# Altium PCB Board_nonBGA.PcbDoc (part 1 of 2)
Units mil, origin at the board's own origin, x right, y up, seen from the top; angles counter-clockwise.
Board outline 6000 x 4000 mil, 2 copper layers (Top Layer, Bottom Layer); 87 components, 98 nets, 630 pads, 48 vias.
Unrouted connection lines stored in the file: 240.
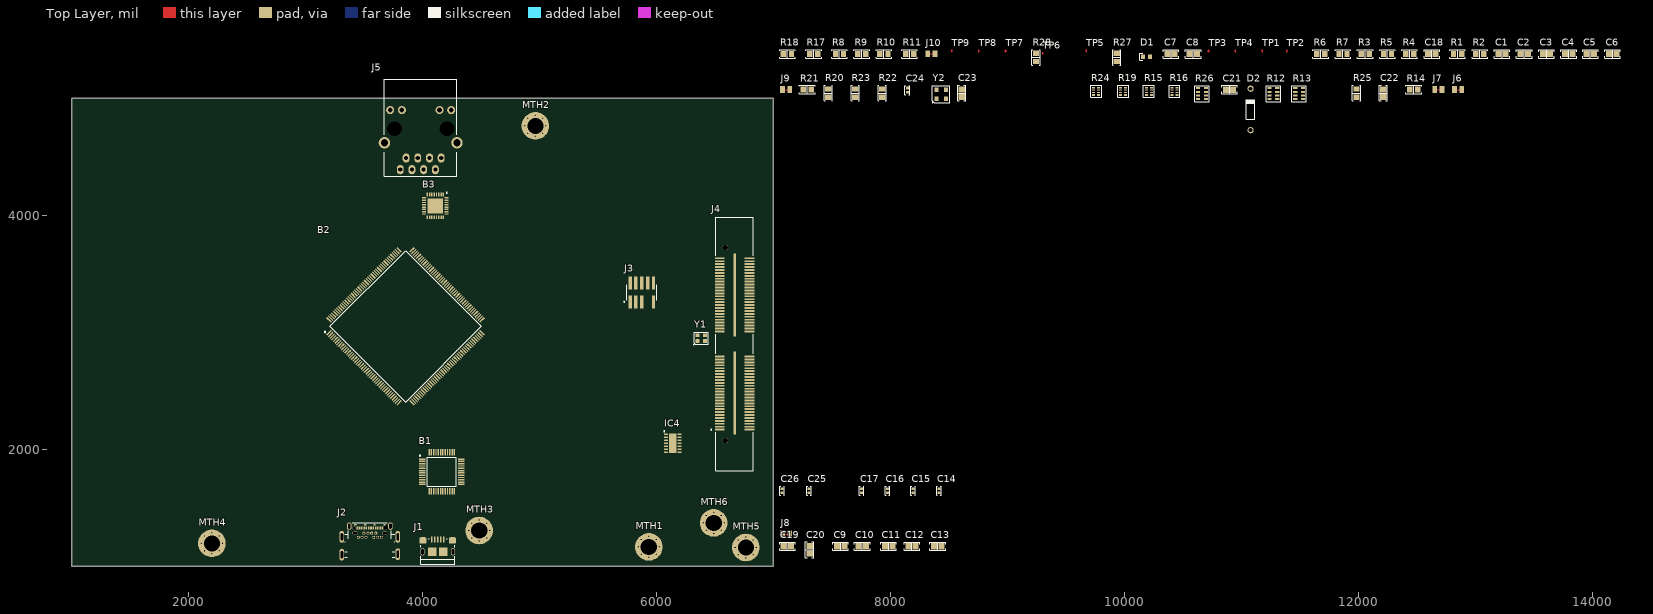
[diagram p0: Top Layer view]
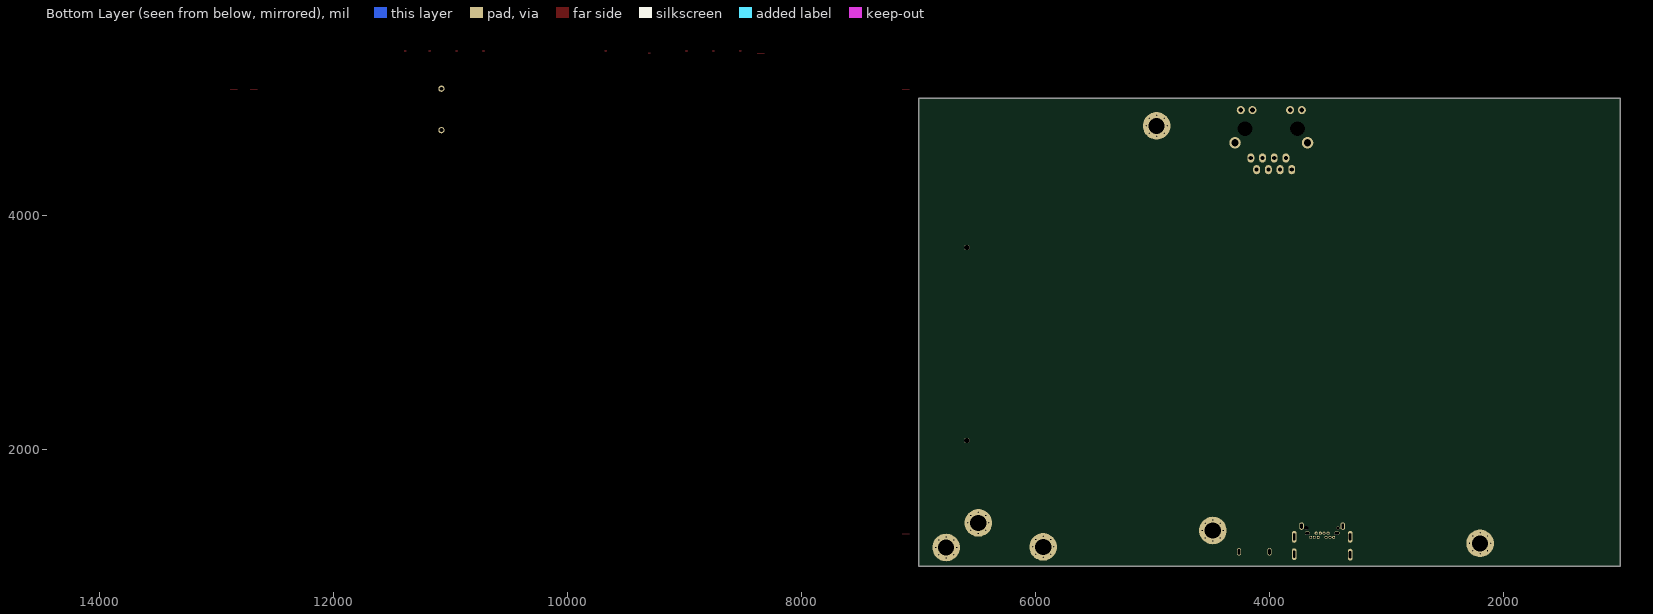
[diagram p1: Bottom Layer view, seen from below]

## Layer stack, top to bottom
Top Solder: solder mask 0.4, Solder Resist, Dk 3.5
Top Layer: signal copper 1.4
Dielectric 1: dielectric 12.6, FR-4, Dk 4.8
Bottom Layer: signal copper 1.4
Bottom Solder: solder mask 0.4, Solder Resist, Dk 3.5

## Board outline
1000,1000 7000,1000 7000,5000 1000,5000

## Design rules (kind name [scope] priority, off if disabled: settings)
Clearance [All] p1: gap=10 ignorepadtopadclearanceinfootprint=FALSE except(0: Arc-Hole Track-Hole SMDPad-Hole THPad-Hole Via-Hole Fill-Hole Poly-Hole Region-Hole Text-Hole)
DiffPairsRouting [All] p1: maxlimit=10 minlimit=10 mostfreqgap=10 toplayer_minwidth=15 toplayer_maxwidth=15 toplayer_prefwidth=15 bottomlayer_minwidth=15 bottomlayer_maxwidth=15 bottomlayer_prefwidth=15 maxuncoupledlength=500
PolygonConnect [All] p1: connectstyle=Relief reliefconductorwidth=10 reliefentries=4 polygonreliefangle="90 Angle" airgapwidth=10
RoutingVias [All] p1: holewidth=28 width=50 viastyle="Through Hole" minholewidth=28 minwidth=50 maxholewidth=28 maxwidth=50
SolderMaskExpansion [All] p1: expansion=4 istentingtop=FALSE
Width [All] p1: maxlimit=10 minlimit=10 preferedwidth=10
29 further rules are at their usual default settings.

## Classes and differential pairs
component class U_HighSpeedInterfaces: B3 C21 C22 C23 C24 D2 J5 J6 J7 J9 R12 R13 R14 R15 R16 R19 R20 R21 R22 R23 R24 R25 R26 Y2
component class U_CanFD: C14 C15 C16 C17 C25 C26 IC1 IC2 IC4
component class U_Board: B2 C9 C10 C11 C12 C13 C19 C20 J8 MTH1 MTH2 MTH3 MTH4 MTH5 MTH6
component class U_JTAG: B1 C1 C2 C3 C4 C5 C6 C7 C8 C18 D1 J1 J2 J3 J10 R1 R2 R3 R4 R5 R6 R7 R8 R9 R10 R11 R17 R18 R27 R28 TP1 TP2 TP3 TP4 TP5 TP6 TP7 TP8 TP9 Y1
component class U_Connectors: J4
differential pair TP_B: +TP_B_P -TP_B_N
differential pair TP_A: +TP_A_P -TP_A_N

## Components (designator, comment, footprint, x,y, rotation, side; value= is the part's Value field where it differs from the comment)
B1 "R7FA4M2AD3CFL#BA0" QFP50P900X900X170-48N 4165,1807.73 r0 top
B2 "R7FA8M1AFECFC#BA0" QFP50P2600X2600X160-176N 3855,3050 r45 top
B3 "1894K-32LF" 1894K-32LF 4110,4080 r270 top
C1 "0.1 µF" "CAP 0805_2012" 13230,5380 r0 top
C2 "0.1 µF" "CAP 0805_2012" 13420,5380 r0 top
C3 "0.1 µF" "CAP 0805_2012" 13610,5380 r0 top
C4 "0.1 µF" "CAP 0805_2012" 13800,5380 r0 top
C5 "0.1 µF" "CAP 0805_2012" 13985,5380 r0 top
C6 "0.1 µF" "CAP 0805_2012" 14175,5380 r0 top
C7 "10 pF" "CAP 0805_2012" 10400,5380 r0 top
C8 "10 pF" "CAP 0805_2012" 10590,5380 r0 top
C9 "10 µF" "CAP 0805_2012" 7575,1170 r0 top
C10 "100nF" "CAP 0805_2012" 7760,1170 r0 top
C11 "100nF" "CAP 0805_2012" 7985,1170 r0 top
C12 "10 µF" "CAP 0805_2012" 8185,1170 r0 top
C13 "100nF" "CAP 0805_2012" 8405,1170 r0 top
C14 "0.1 µF" "CAP 0402_1005" 8415,1645 r90 top
C15 "0.1 µF" "CAP 0402_1005" 8195,1645 r90 top
C16 "0.1 µF" "CAP 0402_1005" 7975,1645 r90 top
C17 "0.1 µF" "CAP 0402_1005" 7755,1645 r90 top
C18 "0.22 µF" "CAP 0805_2012" 12630,5380 r0 top
C19 "22µF" "CAP 0805_2012" 7120,1170 r0 top
C20 "100nF" "CAP 0805_2012" 7310,1140 r90 top
C21 "10 pF" "CAP 0805_2012" 10900,5075 r0 top
C22 "10 µF" "CAP 0805_2012" 12215,5045 r90 top
C23 "10 µF" "CAP 0805_2012" 8610,5045 r90 top
C24 "0.1 µF" "CAP 0402_1005" 8145,5070 r90 top
C25 "0.1 µF" "CAP 0402_1005" 7305,1645 r90 top
C26 "0.1 µF" "CAP 0402_1005" 7075,1645 r90 top
D1 "RED" LED_0603_RED 10190,5355 r0 top
D2 "1N4148" NXP-SOD27-2_V 11080,4905 r90 top
IC4 "MCP2518FDT-H_QBB" SON65P300X450X90-15N-D 6140,2050 r0 top
J1 "10118193-0001LF" "FCI USB 10118193-0001LF" 4130.48,1125.51 r180 top
J2 "2129691-1" "TE USB-C 2129691-1" 3550,1150 r180 top
J3 "FTSH-105-01-L-DV-007" SAMTEC_FTSH-105-01-L-DV-007 5875,3340 r0 top
J4 "QFS-052-04.25-XX-D-A-GP" SAMTEC_QFS-052-04.25-XX-D-A-GP 6669.1,2900 r90 top
J5 "ARJC02-111008B" "ABRACON ARJC02-111008B" 3985,4750 r180 top
J6 "A solder Bridge" "Solder Bridge 805" 12855,5075 r0 top
J7 "A solder Bridge" "Solder Bridge 805" 12685,5075 r0 top
J8 "A solder Bridge" "Solder Bridge 805" 7110,1275 r0 top
J9 "A solder Bridge" "Solder Bridge 805" 7110,5075 r0 top
J10 "A solder Bridge" "Solder Bridge 805" 8350,5380 r0 top
MTH1 "Mounting_Hole_3.5mm" Mounting_Hole_3.5mm 5935,1165 r0 top
MTH2 "Mounting_Hole_3.5mm" Mounting_Hole_3.5mm 4965,4765 r0 top
MTH3 "Mounting_Hole_3.5mm" Mounting_Hole_3.5mm 4485,1305 r0 top
MTH4 "Mounting_Hole_3.5mm" Mounting_Hole_3.5mm 2200,1195 r0 top
MTH5 "Mounting_Hole_3.5mm" Mounting_Hole_3.5mm 6765,1160 r0 top
MTH6 "Mounting_Hole_3.5mm" Mounting_Hole_3.5mm 6490,1370 r0 top
R1 "150 Ohms" "RES 0805_2012" 12850,5380 r0 top
R2 "30 kOhms" "RES 0805_2012" 13040,5380 r0 top
R3 "10k" "RES 0805_2012" 12060,5380 r0 top
R4 "150 Ohms" "RES 0805_2012" 12440,5380 r0 top
R5 "150 Ohms" "RES 0805_2012" 12250,5380 r0 top
R6 "4.7 kOhms" "RES 0805_2012" 11680,5380 r0 top
R7 "150 Ohms" "RES 0805_2012" 11870,5380 r0 top
R8 "10k" "RES 0805_2012" 7565,5380 r0 top
R9 "10k" "RES 0805_2012" 7755,5380 r0 top
R10 "10k" "RES 0805_2012" 7945,5380 r0 top
R11 "150 Ohms" "RES 0805_2012" 8165,5380 r0 top
R12 "10k" "RESNET 1206-8 CONVEX" 11275,5040 r0 top
R13 "10k" "RESNET 1206-8 CONVEX" 11495,5040 r0 top
R14 "1 kOhms" "RES 0805_2012" 12475,5075 r0 top
R15 "33R" "RESNET 0804-8 CONVEX" 10210,5060 r0 top
R16 "33R" "RESNET 0804-8 CONVEX" 10430,5060 r0 top
R17 "5.1 kOhms" "RES 0805_2012" 7345,5380 r0 top
R18 "5.1 kOhms" "RES 0805_2012" 7120,5380 r0 top
R19 "33R" "RESNET 0804-8 CONVEX" 9990,5060 r0 top
R20 "1 kOhms" "RES 0805_2012" 7470,5045 r90 top
R21 "10 kOhms" "RES 0805_2012" 7290,5075 r0 top
R22 "1 kOhms" "RES 0805_2012" 7930,5045 r90 top
R23 "10 kOhms" "RES 0805_2012" 7700,5045 r90 top
R24 "33R" "RESNET 0804-8 CONVEX" 9760,5060 r0 top
R25 "1 kOhms" "RES 0805_2012" 11985,5045 r90 top
R26 "10k" "RESNET 1206-8 CONVEX" 10665,5040 r0 top
R27 "15 kOhms" "RES 0805_2012" 9935,5350 r90 top
R28 "30 kOhms" "RES 0805_2012" 9245,5350 r90 top
TP1 "TestPad" "Test Pad Small" 11180,5405 r90 top
TP2 "TestPad" "Test Pad Small" 11390,5405 r90 top
TP3 "TestPad" "Test Pad Small" 10720,5405 r90 top
TP4 "TestPad" "Test Pad Small" 10950,5405 r90 top
TP5 "TestPad" "Test Pad Small" 9675,5405 r90 top
TP6 "TestPad" "Test Pad Small" 9303.4,5385 r90 top
TP7 "TestPad" "Test Pad Small" 8985,5405 r90 top
TP8 "TestPad" "Test Pad Small" 8755,5405 r90 top
TP9 "TestPad" "Test Pad Small" 8525,5405 r90 top
Y1 "12MHz" "ABRACON ABM10" 6382.52,2949.61 r0 top
Y2 "50MHz" "ABRACON ASEMB" 8435,5035 r0 top

## Footprints (in the part's own frame and the unit in brackets; to place one, negate y for a bottom-side part, rotate by r counter-clockwise, add the part's x,y. Pads: shape width x height; smd on the part's side, far side on the other; paste and mask are expansions set on the pad)
1894K-32LF [mm]
  rect 0.85x0.3 smd: 1(-2.45,1.75) 2(-2.45,1.25) 3(-2.45,0.75) 4(-2.45,0.25) 5(-2.45,-0.25) 6(-2.45,-0.75) 7(-2.45,-1.25) 8(-2.45,-1.75) 17(2.45,-1.75) 18(2.45,-1.25) 19(2.45,-0.75) 20(2.45,-0.25) 21(2.45,0.25) 22(2.45,0.75) 23(2.45,1.25) 24(2.45,1.75)
  rect 0.3x0.85 smd: 9(-1.75,-2.45) 10(-1.25,-2.45) 11(-0.75,-2.45) 12(-0.25,-2.45) 13(0.25,-2.45) 14(0.75,-2.45) 15(1.25,-2.45) 16(1.75,-2.45) 25(1.75,2.45) 26(1.25,2.45) 27(0.75,2.45) 28(0.25,2.45) 29(-0.25,2.45) 30(-0.75,2.45) 31(-1.25,2.45) 32(-1.75,2.45)
  rect 3.3x3.3 smd: 33(0,0)
  silkscreen extent -3,2.38 -2.75,2.63, body extent -2.55,-2.55 2.55,2.55, height 1
"ABRACON ABM10" [mm] "Crystal, 4-Leads, Body 2.00x2.45mm, Pitch 1.65mm, IPC Medium Density"
  rect 0.9x0.8 smd: 1(-0.825,-0.625) 2(0.825,-0.625) 3(0.825,0.625) 4(-0.825,0.625)
  silkscreen extent -1.65,-1.45 1.5,1.3, body extent -1.27,-1.02 1.28,1.03, height 0.5
"ABRACON ARJC02-111008B" [mm]
  oval 1.5x2 hole 0.9: 1(-4.445,6.6) 2(-3.175,9.14) 3(-1.905,6.6) 4(-0.635,9.14) 5(0.635,6.6) 6(1.905,9.14) 7(3.175,6.6) 8(4.445,9.14)
  round 1.75 hole 1.02: 9(-6.63,-3.81) 10(-4.09,-3.81) 11(4.09,-3.81) 12(6.63,-3.81)
  round 0 hole 3.2 unplated: M(-5.715,0.25) M(5.715,0.25)
  round 2.5 hole 1.6: S(-7.875,3.3) S(7.875,3.3)
  silkscreen extent -7.87,-10.54 7.87,10.54, body extent -10.34,-10.55 10.34,10.55, height 16.07
"ABRACON ASEMB" [mm] "MEMS Clock, 4-Leads, Body 2.50x3.20mm, Pitch 2.10mm, IPC Medium Density"
  rect 0.9x1 smd: 1(-1.05,-0.95) 2(1.05,-0.95) 3(1.05,0.95) 4(-1.05,0.95)
  silkscreen extent -1.95,-1.85 1.9,1.8, body extent -1.63,-1.28 1.63,1.27, height 0.85
"CAP 0402_1005" [mm] "Chip Capacitor, 2-Leads, Body 1.02x0.51mm, IPC Medium Density"
  rect 0.6x0.64 smd: 1(-0.44,0) 2(0.44,0)
  silkscreen extent -1,-0.5 1,0.5, body extent -0.5,-0.26 0.5,0.26, height 0.52
"CAP 0805_2012" [mm] "Chip Capacitor, 2-Leads, Body 2.00x1.20mm, IPC Medium Density"
  rect 1.3x1.4 smd: 1(-0.8,0) 2(0.8,0)
  silkscreen extent -1.7,-0.9 1.7,0.9, body extent -1,-0.64 1,0.64, height 1.26
"FCI USB 10118193-0001LF" [mm] "USB 2.0 Type B Micro"
  oval 0.4x1.35 smd: 1(1.3,-2.625) 2(0.65,-2.625) 3(0,-2.625) 4(-0.65,-2.625) 5(-1.3,-2.625)
  oval 0.9x1.6 hole 0.5 slot 1.2 at 90 deg: S(-3.3,0.05) S(3.3,0.05)
  rrect50% 1.6x1.4 smd: S(-3.2,-2.4) S(3.2,-2.4)
  rect 1.9x1.8 smd: S(-1.2,0.05) S(1.2,0.05)
  silkscreen extent -3.7,-2.8 3.7,2.8, body extent -3.93,-2.9 3.93,2.76, height 2.78
LED_0603_RED [mm]
  rect 0.8x1 smd: A(0.75,0) K(-0.75,0)
  silkscreen extent -1.5,-0.8 -0.8,0.8, body extent -0.8,-0.4 0.8,0.4, height 0.6
Mounting_Hole_3.5mm [mm]
  round 6 hole 3.5: 1(0,0)
NXP-SOD27-2_V [mm] "SOD27, 2-Leads, Dia 1.85mm, Body Length 4.25mm, Pin Spacing 9mm"
  round 1.35 hole 0.85: 1(-4.5,0) 2(4.5,0)
  silkscreen extent -2.12,-0.93 2.13,0.92, body extent -4.78,-0.93 4.78,0.92, height 1.85
QFP50P900X900X170-48N [mm]
  rect 1.475x0.3 smd: 1(-4.238,2.75) 2(-4.238,2.25) 3(-4.238,1.75) 4(-4.238,1.25) 5(-4.238,0.75) 6(-4.238,0.25) 7(-4.238,-0.25) 8(-4.238,-0.75) 9(-4.238,-1.25) 10(-4.238,-1.75) 11(-4.238,-2.25) 12(-4.238,-2.75) 25(4.238,-2.75) 26(4.238,-2.25) 27(4.238,-1.75) 28(4.238,-1.25) 29(4.238,-0.75) 30(4.238,-0.25) 31(4.238,0.25) 32(4.238,0.75) 33(4.238,1.25) 34(4.238,1.75) 35(4.238,2.25) 36(4.238,2.75)
  rect 0.3x1.475 smd: 13(-2.75,-4.238) 14(-2.25,-4.238) 15(-1.75,-4.238) 16(-1.25,-4.238) 17(-0.75,-4.238) 18(-0.25,-4.238) 19(0.25,-4.238) 20(0.75,-4.238) 21(1.25,-4.238) 22(1.75,-4.238) 23(2.25,-4.238) 24(2.75,-4.238) 37(2.75,4.238) 38(2.25,4.238) 39(1.75,4.238) 40(1.25,4.238) 41(0.75,4.238) 42(0.25,4.238) 43(-0.25,4.238) 44(-0.75,4.238) 45(-1.25,4.238) 46(-1.75,4.238) 47(-2.25,4.238) 48(-2.75,4.238)
  silkscreen extent -4.85,-3.15 3.15,3.62
QFP50P2600X2600X160-176N [mm]
  rect 1.475x0.3 smd: 1(-12.738,10.75) 2(-12.738,10.25) 3(-12.738,9.75) 4(-12.738,9.25) 5(-12.738,8.75) 6(-12.738,8.25) 7(-12.738,7.75) 8(-12.738,7.25) 9(-12.738,6.75) 10(-12.738,6.25) 11(-12.738,5.75) 12(-12.738,5.25) 13(-12.738,4.75) 14(-12.738,4.25) 15(-12.738,3.75) 16(-12.738,3.25) 17(-12.738,2.75) 18(-12.738,2.25) 19(-12.738,1.75) 20(-12.738,1.25) 21(-12.738,0.75) 22(-12.738,0.25) 23(-12.738,-0.25) 24(-12.738,-0.75) 25(-12.738,-1.25) 26(-12.738,-1.75) 27(-12.738,-2.25) 28(-12.738,-2.75) 29(-12.738,-3.25) 30(-12.738,-3.75) 31(-12.738,-4.25) 32(-12.738,-4.75) 33(-12.738,-5.25) 34(-12.738,-5.75) 35(-12.738,-6.25) 36(-12.738,-6.75) 37(-12.738,-7.25) 38(-12.738,-7.75) 39(-12.738,-8.25) 40(-12.738,-8.75) 41(-12.738,-9.25) 42(-12.738,-9.75) 43(-12.738,-10.25) 44(-12.738,-10.75) 89(12.738,-10.75) 90(12.738,-10.25) 91(12.738,-9.75) 92(12.738,-9.25) 93(12.738,-8.75) 94(12.738,-8.25) 95(12.738,-7.75) 96(12.738,-7.25) 97(12.738,-6.75) 98(12.738,-6.25) 99(12.738,-5.75) 100(12.738,-5.25) 101(12.738,-4.75) 102(12.738,-4.25) 103(12.738,-3.75) 104(12.738,-3.25) 105(12.738,-2.75) 106(12.738,-2.25) 107(12.738,-1.75) 108(12.738,-1.25) 109(12.738,-0.75) 110(12.738,-0.25) 111(12.738,0.25) 112(12.738,0.75) 113(12.738,1.25) 114(12.738,1.75) 115(12.738,2.25) 116(12.738,2.75) 117(12.738,3.25) 118(12.738,3.75) 119(12.738,4.25) 120(12.738,4.75) 121(12.738,5.25) 122(12.738,5.75) 123(12.738,6.25) 124(12.738,6.75) 125(12.738,7.25) 126(12.738,7.75) 127(12.738,8.25) 128(12.738,8.75) 129(12.738,9.25) 130(12.738,9.75) 131(12.738,10.25) 132(12.738,10.75)
  rect 0.3x1.475 smd: 45(-10.75,-12.738) 46(-10.25,-12.738) 47(-9.75,-12.738) 48(-9.25,-12.738) 49(-8.75,-12.738) 50(-8.25,-12.738) 51(-7.75,-12.738) 52(-7.25,-12.738) 53(-6.75,-12.738) 54(-6.25,-12.738) 55(-5.75,-12.738) 56(-5.25,-12.738) 57(-4.75,-12.738) 58(-4.25,-12.738) 59(-3.75,-12.738) 60(-3.25,-12.738) 61(-2.75,-12.738) 62(-2.25,-12.738) 63(-1.75,-12.738) 64(-1.25,-12.738) 65(-0.75,-12.738) 66(-0.25,-12.738) 67(0.25,-12.738) 68(0.75,-12.738) 69(1.25,-12.738) 70(1.75,-12.738) 71(2.25,-12.738) 72(2.75,-12.738) 73(3.25,-12.738) 74(3.75,-12.738) 75(4.25,-12.738) 76(4.75,-12.738) 77(5.25,-12.738) 78(5.75,-12.738) 79(6.25,-12.738) 80(6.75,-12.738) 81(7.25,-12.738) 82(7.75,-12.738) 83(8.25,-12.738) 84(8.75,-12.738) 85(9.25,-12.738) 86(9.75,-12.738) 87(10.25,-12.738) 88(10.75,-12.738) 133(10.75,12.738) 134(10.25,12.738) 135(9.75,12.738) 136(9.25,12.738) 137(8.75,12.738) 138(8.25,12.738) 139(7.75,12.738) 140(7.25,12.738) 141(6.75,12.738) 142(6.25,12.738) 143(5.75,12.738) 144(5.25,12.738) 145(4.75,12.738) 146(4.25,12.738) 147(3.75,12.738) 148(3.25,12.738) 149(2.75,12.738) 150(2.25,12.738) 151(1.75,12.738) 152(1.25,12.738) 153(0.75,12.738) 154(0.25,12.738) 155(-0.25,12.738) 156(-0.75,12.738) 157(-1.25,12.738) 158(-1.75,12.738) 159(-2.25,12.738) 160(-2.75,12.738) 161(-3.25,12.738) 162(-3.75,12.738) 163(-4.25,12.738) 164(-4.75,12.738) 165(-5.25,12.738) 166(-5.75,12.738) 167(-6.25,12.738) 168(-6.75,12.738) 169(-7.25,12.738) 170(-7.75,12.738) 171(-8.25,12.738) 172(-8.75,12.738) 173(-9.25,12.738) 174(-9.75,12.738) 175(-10.25,12.738) 176(-10.75,12.738)
  silkscreen extent -13.35,-11.65 11.65,11.65
"RES 0805_2012" [mm] "Chip Resistor, 2-Leads, Body 2.00x1.25mm, IPC Medium Density"
  rect 1.15x1.35 smd: 1(-0.875,0) 2(0.875,0)
  silkscreen extent -1.7,-0.9 1.7,0.9, body extent -1,-0.62 1,0.63, height 0.6
"RESNET 0804-8 CONVEX" [mm] "4 resistor 2.0x1.0mm, 0.65mm high"
  rect 0.65x0.35 smd: 1(-0.55,0.8) 4(-0.55,-0.8) 5(0.55,-0.8) 8(0.55,0.8)
  rect 0.65x0.25 smd: 2(-0.55,0.25) 3(-0.55,-0.25) 6(0.55,-0.25) 7(0.55,0.25)
  silkscreen extent -1.17,-1.28 1.17,1.28, body extent -0.53,-1.02 0.53,1.03, height 0.56
"RESNET 1206-8 CONVEX" [mm] "4 resistor 3.20x1.60mm, 0.7mm high"
  rect 0.9x0.45 smd: 1(-0.85,1.2) 2(-0.85,0.4) 3(-0.85,-0.4) 4(-0.85,-1.2) 5(0.85,-1.2) 6(0.85,-0.4) 7(0.85,0.4) 8(0.85,1.2)
  silkscreen extent -1.6,-1.73 1.6,1.73, body extent -0.84,-1.62 0.84,1.63, height 0.71
SAMTEC_FTSH-105-01-L-DV-007 [mm]
  rect 0.74x2.79 smd: 01(-2.54,-2.035) 02(-2.54,2.035) 03(-1.27,-2.035) 04(-1.27,2.035) 05(0,-2.035) 06(0,2.035) 08(1.27,2.035) 09(2.54,-2.035) 10(2.54,2.035)
  silkscreen extent -3.92,-2.13 3.26,1.72
SAMTEC_QFS-052-04.25-XX-D-A-GP [mil]
  rect 16x85 smd: 01(-732.5,127.5) 02(-732.5,-127.5) 03(-707.5,127.5) 04(-707.5,-127.5) 05(-682.5,127.5) 06(-682.5,-127.5) 07(-657.5,127.5) 08(-657.5,-127.5) 09(-632.5,127.5) 10(-632.5,-127.5) 11(-607.5,127.5) 12(-607.5,-127.5) 13(-582.5,127.5) 14(-582.5,-127.5) 15(-557.5,127.5) 16(-557.5,-127.5) 17(-532.5,127.5) 18(-532.5,-127.5) 19(-507.5,127.5) 20(-507.5,-127.5) 21(-482.5,127.5) 22(-482.5,-127.5) 23(-457.5,127.5) 24(-457.5,-127.5) 25(-432.5,127.5) 26(-432.5,-127.5) 27(-407.5,127.5) 28(-407.5,-127.5) 29(-382.5,127.5) 30(-382.5,-127.5) 31(-357.5,127.5) 32(-357.5,-127.5) 33(-332.5,127.5) 34(-332.5,-127.5) 35(-307.5,127.5) 36(-307.5,-127.5) 37(-282.5,127.5) 38(-282.5,-127.5) 39(-257.5,127.5) 40(-257.5,-127.5) 41(-232.5,127.5) 42(-232.5,-127.5) 43(-207.5,127.5) 44(-207.5,-127.5) 45(-182.5,127.5) 46(-182.5,-127.5) 47(-157.5,127.5) 48(-157.5,-127.5) 49(-132.5,127.5) 50(-132.5,-127.5) 51(-107.5,127.5) 52(-107.5,-127.5) 53(107.5,127.5) 54(107.5,-127.5) 55(132.5,127.5) 56(132.5,-127.5) 57(157.5,127.5) 58(157.5,-127.5) 59(182.5,127.5) 60(182.5,-127.5) 61(207.5,127.5) 62(207.5,-127.5) 63(232.5,127.5) 64(232.5,-127.5) 65(257.5,127.5) 66(257.5,-127.5) 67(282.5,127.5) 68(282.5,-127.5) 69(307.5,127.5) 70(307.5,-127.5) 71(332.5,127.5) 72(332.5,-127.5) 73(357.5,127.5) 74(357.5,-127.5) 75(382.5,127.5) 76(382.5,-127.5) 77(407.5,127.5) 78(407.5,-127.5) 79(432.5,127.5) 80(432.5,-127.5) 81(457.5,127.5) 82(457.5,-127.5) 83(482.5,127.5) 84(482.5,-127.5) 85(507.5,127.5) 86(507.5,-127.5) 87(532.5,127.5) 88(532.5,-127.5) 89(557.5,127.5) 90(557.5,-127.5) 91(582.5,127.5) 92(582.5,-127.5) 93(607.5,127.5) 94(607.5,-127.5) 95(632.5,127.5) 96(632.5,-127.5) 97(657.5,127.5) 98(657.5,-127.5) 99(682.5,127.5) 100(682.5,-127.5) 101(707.5,127.5) 102(707.5,-127.5) 103(732.5,127.5) 104(732.5,-127.5)
  rect 710x20 smd: G1(-420,0) G2(420,0)
  round 46 hole 46 unplated: ""(-825,80) ""(825,80)
  silkscreen extent -1085,-160 1085,205
"Solder Bridge 805" [mm] "Closed Solder Bridge"
  rect 1.05x1.45 smd: 1(-0.775,0) 2(0.775,0)
  Top Layer lines w0.254: -0.775,0 0.775,0
SON65P300X450X90-15N-D [mm]
  rect 0.85x0.35 smd: 1(-1.45,1.95) 2(-1.45,1.3) 3(-1.45,0.65) 4(-1.45,0) 5(-1.45,-0.65) 6(-1.45,-1.3) 7(-1.45,-1.95) 8(1.45,-1.95) 9(1.45,-1.3) 10(1.45,-0.65) 11(1.45,0) 12(1.45,0.65) 13(1.45,1.3) 14(1.45,1.95)
  rect 1.7x4.25 smd: 15(0,0)
  silkscreen extent -2,2.5 -1.75,2.75, body extent -1.55,-2.25 1.55,2.25, height 0.9
"TE USB-C 2129691-1" [mm]
  rect 0.35x0.6 smd: A1(2.75,-4.5) A2(2.25,-4.5) A3(1.75,-4.5) A4(1.25,-4.5) A5(0.75,-4.5) A6(0.25,-4.5) A7(-0.25,-4.5) A8(-0.75,-4.5) A9(-1.25,-4.5) A10(-1.75,-4.5) A11(-2.25,-4.5) A12(-2.75,-4.5)
  oval 1.15x0.65 hole 0.4 slot 0.9 at 0 deg: B1(-3.2,-3.36) B12(3.2,-3.36)
  round 0.65 hole 0.4: B2(-2.5,-2.46) B3(-1.7,-2.46) B4(-1.3,-3.36) B5(-0.85,-2.46) B6(-0.4,-3.36) B7(0.4,-3.36) B8(0.85,-2.46) B9(1.3,-3.36) B10(1.7,-2.46) B11(2.5,-2.46)
  oval 0.85x0.65 hole 0.65 slot 0.85 at 0 deg unplated mask+0.102: M(-3.45,-4.5)
  round 0.6 hole 0.6 unplated mask+0.102: M(3.45,-4.5)
  oval 1x2.56 hole 0.5 slot 1.5 at 90 deg: S(-6.075,-2.56) S(-6.075,1.2) S(6.075,-2.56) S(6.075,1.3)
  oval 1x1.6 hole 0.5 slot 1.1 at 90 deg: S(-4.475,-4.9) S(4.475,-4.9)
  rect 0.5x0.3 smd: S(-3.2,-5.19) S(-1,-5.19) S(1,-5.19) S(3.2,-5.19)
  silkscreen extent -5.4,-5.6 5.4,1.9, body extent -6.18,-5.3 6.18,5.4, height 2.27
"Test Pad Small" [mil] "A small test pad for HF applications"
  Top Layer circle w10: c0,0 r5

## Part data
B1: "The Renesas RA4M2 group of 32-bit microcontrollers (MCUs) uses the high-performance Arm Cortex-M33 core with TrustZone. In concert with the secure crypto engine, it offers secure element functionality. The RA4M2 is built on a highly efficient 40nm process and is supported by an open and flexible ecosystem conceptthe Flexible Software Package (FSP), built on FreeRTOSand is expandable to use other RTOSes and middleware. The RA4M2 is suitable for IoT applications requiring vast communication options, futur", Manufacturer_Name="Renesas Electronics", Mouser Part Number=968-R7FA4M2AD3CFLBA0, Datasheet Link=https://www.renesas.com/us/en/document/dst/ra4m2-group-datasheet?r=1469026, Geometry.Height=1.7mm, Manufacturer_Part_Number=R7FA4M2AD3CFL#BA0, Mouser Price/Stock=https://www.mouser.co.uk/ProductDetail/Renesas-Electronics/R7FA4M2AD3CFLBA0?qs=63Lh8XYXgju%252BRagHRVe0qQ%3D%3D
B2: "-40/+125C ARM Microcontrollers - MCU MCU RA8M1 ARM CM85 1M LQFP176 Package", Manufacturer_Name="Renesas Electronics", Datasheet Link=https://www.renesas.com/eu/en/document/dst/ra8m1-group-datasheet?r=25447396, Geometry.Height=1.6mm, Manufacturer_Part_Number=R7FA8M1AFECFC#BA0
B3: "The IDT1894-32 is a low-power, physical-layer device (PHY) that supports the ISO/IEC 10Base-T and 100Base-TX Carrier-Sense Multiple Access/Collision Detection (CSMA/CD) Ethernet standards, ISO/IEC 8802-3. The IDT1894-32 is intended for MII, Node applications that require the Auto-MDIX feature that automatically corrects crossover errors in plant wiring. The IDT1894-32 incorporates Digital-Signal Processing (DSP) control in its Physical-Medium Dependent (PMD) sub layer. As a result, it can transmit and recei", Manufacturer_Name="Renesas Electronics", Mouser Part Number=972-1894K-32LF, Datasheet Link=https://www.idt.com/document/dst/1894-32-datasheet, Geometry.Height=1mm, Manufacturer_Part_Number=1894K-32LF, Mouser Price/Stock=https://www.mouser.co.uk/ProductDetail/Renesas-IDT/1894K-32LF?qs=JcGQCygHkIbsoRijcJxryA%3D%3D
C1 C2 C3 C4 C5 C6: library part 160R15W104KV4T, "CAP CER 0.1UF 16V X7R 0805", Device Package="0805 (2012 Metric)", Manufacturer="Johanson Dielectrics Inc.", Operating Temperature="-55°C ~ 125°C", Supplier Part Number 1=709-1183-1-ND, Temperature Coefficient=X7R, Tolerance=±10%, Voltage - Rated=16V, Applications="General Purpose", Capacitance="0.1 µF", ComponentLink1Description=Datasheet, ComponentLink1URL=https://www.johansondielectrics.com/downloads/catalog/johanson-dielectrics-product-catalog.pdf, ComponentLink2Description="DigiKey Link", ComponentLink2URL=https://www.digikey.com/en/products/detail/johanson-dielectrics-inc/160R15W104KV4T/1859428, LastUpdated="03/02/2024 20:15:33", Lifecycle Status=Active, Minimum Order=1, Mounting Type="Surface Mount, MLCC", Package / Case="0805 (2012 Metric)", Packaging=TapeAndReel, Part Number=160R15W104KV4T, Part Status=Active, PartId=9125, Price=0.03, Series=-, Size / Dimension="0.080\" L x 0.050\" W (2.03mm x 1.27mm)", Supplier 1=DigiKey, Thickness (Max)="0.050\" (1.27mm)"
C7 C8 C21: library part 251R15S100GV4E, "CAP CER 10PF 250V NP0 0805", Device Package="0805 (2012 Metric)", Manufacturer="Johanson Technology Inc.", Operating Temperature="-55°C ~ 125°C", Supplier Part Number 1=712-1719-1-ND, Temperature Coefficient="C0G, NP0", Tolerance=±2%, Voltage - Rated=250V, Applications="RF, Microwave, High Frequency", Capacitance="10 pF", ComponentLink1Description=Datasheet, ComponentLink1URL=https://www.johansontechnology.com/downloads/catalog/johanson-technology-multi-layer-high-q-capacitors.pdf, ComponentLink2Description="DigiKey Link", ComponentLink2URL=https://www.digikey.com/en/products/detail/johanson-technology-inc/251R15S100GV4E/1919428, Features="High Q, Low Loss, Ultra Low ESR", LastUpdated="03/02/2024 20:14:59", Lifecycle Status=Active, Minimum Order=1, Mounting Type="Surface Mount, MLCC", Package / Case="0805 (2012 Metric)", Packaging=TapeAndReel, Part Number=251R15S100GV4E, Part Status=Active, PartId=18355, Price=0.14, Series=S, Size / Dimension="0.080\" L x 0.050\" W (2.03mm x 1.27mm)", Supplier 1=DigiKey, Thickness (Max)="0.046\" (1.17mm)"
C9 C12 C19: library part C2012X7R1A106K125AE, "CAP CER 10UF 10V X7R 0805", Device Package="0805 (2012 Metric)", Manufacturer="TDK Corporation", Operating Temperature="-55°C ~ 125°C", Supplier Part Number 1=445-173616-1-ND, Temperature Coefficient=X7R, Tolerance=±10%, Voltage - Rated=10V, Applications="Boardflex Sensitive", ComponentLink1Description=Datasheet, ComponentLink1URL=https://product.tdk.com/info/en/catalog/datasheets/mlcc_commercial_soft_en.pdf?ref_disty=digikey, ComponentLink2Description="DigiKey Link", ComponentLink2URL=https://www.digikey.com/en/products/detail/tdk-corporation/C2012X7R1A106K125AE/5809181, Features="Soft Termination", LastUpdated="30/01/2024 20:15:17", Lifecycle Status=Active, Minimum Order=1, Mounting Type="Surface Mount, MLCC", Package / Case="0805 (2012 Metric)", Packaging=TapeAndReel, Part Number=C2012X7R1A106K125AE, Part Status=Active, PartId=3036, Price=0.07, Series=C, Size / Dimension="0.079\" L x 0.049\" W (2.00mm x 1.25mm)", Supplier 1=DigiKey, Thickness (Max)="0.059\" (1.50mm)"
  C9 C12: Capacitance="10 µF"
  C19: Capacitance=22µF
C10: library part CBR08C509BAGAC, "CAP CER 5PF 250V C0G/NP0 0805", Device Package="0805 (2012 Metric)", Manufacturer=KEMET, Operating Temperature="-55°C ~ 125°C", Supplier Part Number 1=399-8717-1-ND, Temperature Coefficient="C0G, NP0", Tolerance=±0.1pF, Voltage - Rated=250V, Applications="RF, Microwave, High Frequency", Capacitance=100nF, ComponentLink1Description=Datasheet, ComponentLink1URL=https://api.kemet.com/component-edge/download/datasheet/CBR08C509BAGAC.pdf, ComponentLink2Description="DigiKey Link", ComponentLink2URL=https://www.digikey.com/en/products/detail/kemet/CBR08C509BAGAC/3480211, Features="High Q, Low Loss, Ultra Low ESR", LastUpdated="30/01/2024 20:15:18", Lifecycle Status=Active, Minimum Order=1, Mounting Type="Surface Mount, MLCC", Package / Case="0805 (2012 Metric)", Packaging=TapeAndReel, Part Number=CBR08C509BAGAC, Part Status=Active, PartId=2413, Price=0.38, Series="CBR-SMD RF C0G", Size / Dimension="0.079\" L x 0.049\" W (2.00mm x 1.25mm)", Supplier 1=DigiKey, Thickness (Max)="0.037\" (0.95mm)"
C11 C13: library part C2012X7R1A106K125AE, "CAP CER 10UF 10V X7R 0805", Capacitance="10 µF", Device Package="0805 (2012 Metric)", Manufacturer="TDK Corporation", Operating Temperature="-55°C ~ 125°C", Supplier Part Number 1=445-173616-1-ND, Temperature Coefficient=X7R, Tolerance=±10%, Voltage - Rated=10V, Applications="Boardflex Sensitive", ComponentLink1Description=Datasheet, ComponentLink1URL=https://product.tdk.com/info/en/catalog/datasheets/mlcc_commercial_soft_en.pdf?ref_disty=digikey, ComponentLink2Description="DigiKey Link", ComponentLink2URL=https://www.digikey.com/en/products/detail/tdk-corporation/C2012X7R1A106K125AE/5809181, Features="Soft Termination", LastUpdated="30/01/2024 20:15:17", Lifecycle Status=Active, Minimum Order=1, Mounting Type="Surface Mount, MLCC", Package / Case="0805 (2012 Metric)", Packaging=TapeAndReel, Part Number=C2012X7R1A106K125AE, Part Status=Active, PartId=3036, Price=0.07, Series=C, Size / Dimension="0.079\" L x 0.049\" W (2.00mm x 1.25mm)", Supplier 1=DigiKey, Thickness (Max)="0.059\" (1.50mm)"
C14 C15 C16 C17 C24 C25 C26: library part CL05B104KP5VPNC, "CAP CER 100NF 10V X7R 0402", Device Package="0402 (1005 Metric)", Manufacturer="Samsung Electro-Mechanics", Operating Temperature="-55°C ~ 125°C", Ratings=AEC-Q200, Supplier Part Number 1=1276-CL05B104KP5VPNCCT-ND, Temperature Coefficient=X7R, Tolerance=±10%, Voltage - Rated=10V, Applications=Automotive, Capacitance="0.1 µF", ComponentLink1Description=Datasheet, ComponentLink1URL=https://mm.digikey.com/Volume0/opasdata/d220001/medias/docus/5458/CL05B104KP5VPNC_Spec.pdf, ComponentLink2Description="DigiKey Link", ComponentLink2URL=https://www.digikey.com/en/products/detail/samsung-electro-mechanics/CL05B104KP5VPNC/20498482, LastUpdated="02/02/2024 20:03:11", Lifecycle Status=Active, Minimum Order=1, Mounting Type="Surface Mount, MLCC", Package / Case="0402 (1005 Metric)", Packaging=TapeAndReel, Part Number=CL05B104KP5VPNC, PartId=56690, Price=0.01, Series=CL, Size / Dimension="0.039\" L x 0.020\" W (1.00mm x 0.50mm)", Supplier 1=DigiKey, Thickness (Max)="0.022\" (0.55mm)"
C18: library part C0805X224K3RECAUTO, "CAP CER 0805 220NF 25V X7R 10%", Device Package="0805 (2012 Metric)", Manufacturer=KEMET, Operating Temperature="-55°C ~ 125°C", Ratings=AEC-Q200, Supplier Part Number 1=399-C0805X224K3RECAUTOCT-ND, Temperature Coefficient=X7R, Tolerance=±10%, Voltage - Rated=25V, Applications="Automotive, Boardflex Sensitive, ESD Protection", Capacitance="0.22 µF", ComponentLink1Description=Datasheet, ComponentLink1URL=https://connect.kemet.com:7667/gateway/IntelliData-ComponentDocumentation/1.0/download/datasheet/C0805X224K3RECAUTO, ComponentLink2Description="DigiKey Link", ComponentLink2URL=https://www.digikey.com/en/products/detail/kemet/C0805X224K3RECAUTO/8653353, Features="Soft Termination", LastUpdated="04/02/2024 20:14:58", Lifecycle Status=Active, Minimum Order=1, Mounting Type="Surface Mount, MLCC", Package / Case="0805 (2012 Metric)", Packaging=TapeAndReel, Part Number=C0805X224K3RECAUTO, Part Status=Active, PartId=48903, Price=0.05, Series="ESD SMD Auto X7R", Size / Dimension="0.079\" L x 0.049\" W (2.00mm x 1.25mm)", Supplier 1=DigiKey, Thickness (Max)="0.055\" (1.40mm)"
C20: library part C2012X7R1A106K125AE, "CAP CER 10UF 10V X7R 0805", Capacitance=22µF, Device Package="0805 (2012 Metric)", Manufacturer="TDK Corporation", Operating Temperature="-55°C ~ 125°C", Supplier Part Number 1=445-173616-1-ND, Temperature Coefficient=X7R, Tolerance=±10%, Voltage - Rated=10V, Applications="Boardflex Sensitive", ComponentLink1Description=Datasheet, ComponentLink1URL=https://product.tdk.com/info/en/catalog/datasheets/mlcc_commercial_soft_en.pdf?ref_disty=digikey, ComponentLink2Description="DigiKey Link", ComponentLink2URL=https://www.digikey.com/en/products/detail/tdk-corporation/C2012X7R1A106K125AE/5809181, Features="Soft Termination", LastUpdated="30/01/2024 20:15:17", Lifecycle Status=Active, Minimum Order=1, Mounting Type="Surface Mount, MLCC", Package / Case="0805 (2012 Metric)", Packaging=TapeAndReel, Part Number=C2012X7R1A106K125AE, Part Status=Active, PartId=3036, Price=0.07, Series=C, Size / Dimension="0.079\" L x 0.049\" W (2.00mm x 1.25mm)", Supplier 1=DigiKey, Thickness (Max)="0.059\" (1.50mm)"
C22 C23: library part CL21Y106KPQVPNE, "CAP CER 10UF 10V X7S 0805", Part Number=CL21Y106KPQVPNE
D1: library part LED_0603_RED, "Yellow Plox"
D2: library part CMP-004-00000-2, "High Speed Diode, 100 V, 0.45 A, -65 to 175 degC, 2-Pin SOD27, RoHS, Bulk", Case/Package=DO, Forward Current=300mA, Forward Voltage=1V, Manufacturer=Fairchild, Max Operating Temperature=175°C, Max Surge Current=4A, Min Operating Temperature=-65°C, Package Quantity=2000, Package Reference=SOD27, Peak Reverse Current=5uA, Power=500mW, Datasheet URL=http://www.nxp.com/documents/data_sheet/1N4148_1N4448.pdf, Datasheet Version=Aug-04, Diameter=1.91mm, Elements=1, Manufacturer URL=https://www.fairchildsemi.com/, Package URL=http://www.nxp.com/documents/data_sheet/1N4148_1N4448.pdf, Packaging=Bulk, Pins=2, Recovery Time=4ns, RoHS Compliant=True
IC4: "Integrated Circuit", Arrow Part Number=MCP2518FDT-H/QBB, Manufacturer_Name=Microchip, Mouser Part Number=579-MCP2518FDT-H/QBB, Arrow Price/Stock=https://www.arrow.com/en/products/mcp2518fdt-hqbb/microchip-technology?region=nac, Datasheet Link=https://www.mouser.in/datasheet/2/268/MCP2518FD-Data-Sheet-20006027A-1596921.pdf, Height=0.9mm, Manufacturer_Part_Number=MCP2518FDT-H/QBB, Mouser Price/Stock=https://www.mouser.co.uk/ProductDetail/Microchip-Technology/MCP2518FDT-H-QBB?qs=T3oQrply3y8bDZ20CsIcGQ%3D%3D
J1: "CONN RCPT USB2.0 MICRO B SMD R/A", Current Rating (Amps)="1.8A per Contact", Manufacturer="Amphenol ICC (FCI)", Operating Temperature="-30°C ~ 80°C", Supplier Part Number 1=609-4616-2-ND, Voltage - Rated=100VAC, ComponentLink1Description=Datasheet, ComponentLink1URL=https://cdn.amphenol-icc.com/media/wysiwyg/files/documentation/datasheet/inputoutput/io_usb_micro.pdf, ComponentLink2Description="DigiKey Link", ComponentLink2URL=//digikey.com/product-detail/en/amphenol-icc-fci/10118193-0001LF/609-4616-2-ND/2785388, Connector Type="USB - micro B", Features="Solder Retention", Gender=Receptacle, LastUpdated="09/12/2019 20:51:28", Lifecycle Status=0, Mating Cycles=10000, Minimum Order=1, Mounting Feature=Horizontal, Mounting Type="Surface Mount, Right Angle; Through Hole", Number of Contacts=5, Number of Ports=1, Packaging=TapeAndReel, Part Number=10118193-0001LF, Part Status=Active, Price=0.21, Series=-, Shielding=Shielded, Specifications="USB 2.0", Supplier 1=DigiKey, Termination=Solder
J2: "CONN RCPT USB3.1 TYPEC 24POS SMD", Current Rating (Amps)="0.25A, 1.25A, 5A", Manufacturer="TE Connectivity AMP Connectors", Operating Temperature="-30°C ~ 85°C", Supplier Part Number 1=A122008TR-ND, Voltage - Rated=30V, ComponentLink1Description=Datasheet, ComponentLink1URL=//media.digikey.com/pdf/Data%20Sheets/Tyco%20Electonics%20AMP%20PDFs/2129691_Dwg.pdf, ComponentLink2Description="DigiKey Link", ComponentLink2URL=//digikey.com/product-detail/en/te-connectivity-amp-connectors/2129691-1/A122008TR-ND/5401336, Connector Type="USB - C (Type - C)", Gender=Receptacle, LastUpdated="09/12/2019 20:50:18", Lifecycle Status=0, Mating Cycles=10000, Minimum Order=1, Mounting Feature="Horizontal, Mid Mount", Mounting Type="Board Edge, Cutout; Surface Mount; Through Hole, Right Angle", Number of Contacts=24, Number of Ports=1, Packaging=TapeAndReel, Part Number=2129691-1, Part Status=Active, Price=1.67, Series=-, Specifications="USB 3.1 (USB 3.1 Gen 2, Superspeed+)", Supplier 1=DigiKey, Termination=Solder
J3: "Connector Header Surface Mount 10 position 0.050 (1.27mm)", Package=None, Check_prices=https://www.snapeda.com/parts/FTSH-105-01-L-DV-007-K/Samtec%20Inc./view-part/448626/?ref=eda, Digi-Key_Part_Number=SAM13932TR-ND, MF=Samtec, MP=FTSH-105-01-L-DV-007-K, Purchase-URL=https://pricing.snapeda.com/search/part/FTSH-105-01-L-DV-007-K/?ref=eda, SnapEDA_Link=https://www.snapeda.com/parts/FTSH-105-01-L-DV-007-K/Samtec%20Inc./view-part/448626/?ref=snap
J4: "CONN RCPT 104POS SMD GOLD", Package=None, Availability=Unavailable, MP=QFS-052-04.25-XX-D-A-GP, Price=None
J5: "CONN MAGJACK 1PORT 100 BASE-TX", LED Color="Yellow - Green", Manufacturer="Abracon LLC", Operating Temperature="0°C ~ 70°C", Supplier Part Number 1=535-12605-ND, Applications="10/100 Base-TX, AutoMDIX", ComponentLink1Description=Datasheet, ComponentLink1URL=https://abracon.com/Magnetics/lan/ARJC02-111008B.PDF, ComponentLink2Description="DigiKey Link", ComponentLink2URL=http://digikey.com/product-detail/en/abracon-llc/ARJC02-111008B/535-12605-ND/4696789, Connector Type=RJ45, Features="Board Guide", Height Above Board="0.534\" (13.55mm)", LastUpdated="15/01/2020 03:56:28", Lifecycle Status=Active, Minimum Order=1, Mounting Type="Through Hole", Number of Cores per Jack=4, Number of Ports=1, Number of Rows=1, Orientation="90° Angle (Right)", Packaging=Tray, Part Number=ARJC02-111008B, Part Status=Active, Price=7.80, Series=ARJC02, Shielding="Shielded, EMI Finger", Supplier 1=DigiKey, Tab Direction=Down, Termination=Solder
J6 J7 J8 J9 J10: library part "Solder Bridge 805"
R1 R4 R5 R7 R11: library part 4-2176091-1, "RES SMD 150 OHM 0.1% 1/4W 0805", Device Package="0805 (2012 Metric)", Manufacturer="TE Connectivity Passive Product", Operating Temperature="-55°C ~ 155°C", Power (Watts)="0.25W, 1/4W", Supplier Device Package=0805, Supplier Part Number 1=A110464CT-ND, Temperature Coefficient=±25ppm/°C, Tolerance=±0.1%, ComponentLink1Description=Datasheet, ComponentLink1URL=https://www.te.com/commerce/DocumentDelivery/DDEController?Action=srchrtrv&DocNm=1773272&DocType=DS&DocLang=English, ComponentLink2Description="DigiKey Link", ComponentLink2URL=https://www.digikey.com/en/products/detail/te-connectivity-passive-product/4-2176091-1/4033932, Composition="Thin Film", Height - Seated (Max)="0.026\" (0.65mm)", LastUpdated="04/02/2024 21:05:09", Lifecycle Status=Active, Minimum Order=1, Number of Terminations=2, Package / Case="0805 (2012 Metric)", Packaging=TapeAndReel, Part Number=4-2176091-1, Part Status=Active, PartId=28504, Price=0.14, Resistance="150 Ohms", Series="RP73P, Holsworthy", Size / Dimension="0.079\" L x 0.049\" W (2.00mm x 1.25mm)", Supplier 1=DigiKey
R2 R28: library part 3430A2F30KTDF, "3430 A2 1% 30K 100PPM 1K RL", Device Package="0805 (2012 Metric)", Manufacturer="TE Connectivity Passive Product", Operating Temperature="-55°C ~ 155°C", Power (Watts)=1W, Ratings=AEC-Q200, Supplier Device Package=0508, Supplier Part Number 1=1712-3430A2F30KTDFCT-ND, Temperature Coefficient=±100ppm/°C, Tolerance=±1%, ComponentLink2Description="DigiKey Link", ComponentLink2URL=https://www.digikey.com/en/products/detail/te-connectivity-passive-product/3430A2F30KTDF/17763964, Composition="Thick Film", Features="Automotive AEC-Q200", Height - Seated (Max)="0.026\" (0.65mm)", Lifecycle Status=Active, Minimum Order=1, Number of Terminations=2, Package / Case="0805 (2012 Metric)", Packaging=TapeAndReel, Part Number=3430A2F30KTDF, Part Status=Active, PartId=76016, Price=0.02, Resistance="30 kOhms", Series=3430, Size / Dimension="0.049\" L x 0.079\" W (1.25mm x 2.00mm)", Supplier 1=DigiKey
  R2: LastUpdated="04/02/2024 21:02:40"
  R28: LastUpdated="03/02/2024 20:57:30"
R3 R8 R9 R10: library part 9-2176375-1, "RES 10K OHM 0.1% 1/5W 0805", Device Package="0805 (2012 Metric)", Manufacturer="TE Connectivity Passive Product", Operating Temperature="-55°C ~ 155°C", Power (Watts)="0.2W, 1/5W", Ratings=AEC-Q200, Resistance="10 kOhms", Supplier Device Package=0805, Supplier Part Number 1=1712-9-2176375-1CT-ND, Temperature Coefficient=±10ppm/°C, Tolerance=±0.1%, ComponentLink1Description=Datasheet, ComponentLink1URL=https://www.te.com/usa-en/product-9-2176375-1.datasheet.pdf, ComponentLink2Description="DigiKey Link", ComponentLink2URL=https://www.digikey.com/en/products/detail/te-connectivity-passive-product/9-2176375-1/18110542, Composition="Thin Film", Features="Anti-Sulfur, Automotive AEC-Q200, Moisture Resistant", Height - Seated (Max)="0.026\" (0.65mm)", LastUpdated="04/02/2024 21:02:43", Lifecycle Status=Active, Minimum Order=1, Number of Terminations=2, Package / Case="0805 (2012 Metric)", Packaging=TapeAndReel, Part Number=9-2176375-1, Part Status=Active, PartId=76290, Price=0.39, Series=RQ73, Size / Dimension="0.079\" L x 0.049\" W (2.00mm x 1.25mm)", Supplier 1=DigiKey
R6: library part AC0805FR-7W4K7L, "RES 4.7K OHM 1% 1/4W 0805", Device Package="0805 (2012 Metric)", Manufacturer=Yageo, Operating Temperature="-55°C ~ 155°C", Power (Watts)="0.25W, 1/4W", Ratings=AEC-Q200, Supplier Device Package=0805, Supplier Part Number 1=13-AC0805FR-7W4K7LCT-ND, Temperature Coefficient=±100ppm/°C, Tolerance=±1%, ComponentLink1Description=Datasheet, ComponentLink1URL=https://www.yageo.com/upload/media/product/productsearch/datasheet/rchip/PYu-AC_51_RoHS_L_9.pdf, ComponentLink2Description="DigiKey Link", ComponentLink2URL=https://www.digikey.com/en/products/detail/yageo/AC0805FR-7W4K7L/16989051, Composition="Thick Film", Features="Automotive AEC-Q200, Moisture Resistant", Height - Seated (Max)="0.024\" (0.60mm)", LastUpdated="04/02/2024 21:02:35", Lifecycle Status=Active, Minimum Order=1, Number of Terminations=2, Package / Case="0805 (2012 Metric)", Packaging=TapeAndReel, Part Number=AC0805FR-7W4K7L, Part Status=Active, PartId=77750, Price=0.01, Resistance="4.7 kOhms", Series=AC, Size / Dimension="0.079\" L x 0.049\" W (2.00mm x 1.25mm)", Supplier 1=DigiKey
R12 R13 R26: library part ACASA1001S1002P100, "RES ARRAY 4 RES MULT OHM 1206", Manufacturer="Vishay Beyschlag", Number of Resistors=4, Operating Temperature="-55°C ~ 125°C", Package / Case="1206 (3216 Metric), Convex, Long Side Terminals", Power Per Element=100mW, Resistance (Ohms)="1k, 10k", Resistor Matching Ratio=±0.05%, Resistor-Ratio-Drift=±15ppm/°C, Supplier Part Number 1=749-1017-1-ND, Temperature Coefficient=±25ppm/°C, Tolerance=±0.1%, Applications="Voltage Divider (TCR Matched)", Circuit Type=Isolated, ComponentLink1Description=Datasheet, ComponentLink1URL=http://www.vishay.com/docs/28751/acasprec.pdf, ComponentLink2Description="DigiKey Link", ComponentLink2URL=http://digikey.com/product-detail/en/vishay-beyschlag/ACASA1001S1002P100/749-1017-1-ND/4741023, Height - Seated (Max)="0.022\" (0.55mm)", LastUpdated="02/02/2024 21:35:30", Lifecycle Status=Active, Minimum Order=1, Mounting Type="Surface Mount", Number of Pins=8, Packaging=TapeAndReel, Part Number=ACASA1001S1002P100, Part Status=Active, PartId=354, Price=0.24, Series="ACA - Precision", Size / Dimension="0.126\" L x 0.059\" W (3.20mm x 1.50mm)", Supplier 1=DigiKey
R14 R20 R22 R25: library part RNCS0805BKE1K00, "RES 1K OHM 0.1% 1/10W 0805", Device Package="0805 (2012 Metric)", Manufacturer="Stackpole Electronics Inc", Operating Temperature="-55°C ~ 155°C", Power (Watts)="0.1W, 1/10W", Ratings=AEC-Q200, Supplier Device Package=0805, Supplier Part Number 1=RNCS0805BKE1K00CT-ND, Temperature Coefficient=±25ppm/°C, Tolerance=±0.1%, ComponentLink1Description=Datasheet, ComponentLink1URL=https://www.seielect.com/catalog/sei-rncs_rnch.pdf, ComponentLink2Description="DigiKey Link", ComponentLink2URL=https://www.digikey.com/en/products/detail/stackpole-electronics-inc/RNCS0805BKE1K00/1800073, Composition="Thin Film", Features="Anti-Corrosive, Automotive AEC-Q200, Moisture Resistant", Height - Seated (Max)="0.026\" (0.65mm)", LastUpdated="02/02/2024 21:00:48", Lifecycle Status=Active, Minimum Order=1, Number of Terminations=2, Package / Case="0805 (2012 Metric)", Packaging=TapeAndReel, Part Number=RNCS0805BKE1K00, Part Status=Active, PartId=27715, Price=0.07, Resistance="1 kOhms", Series=RNCS, Size / Dimension="0.079\" L x 0.049\" W (2.00mm x 1.25mm)", Supplier 1=DigiKey
R15 R16 R19 R24: library part EXB-28V433JX, "RES ARRAY 4 RES 43K OHM 0804", Manufacturer="Panasonic Electronic Components", Number of Resistors=4, Operating Temperature="-55°C ~ 125°C", Package / Case="0804, Convex, Long Side Terminals", Power Per Element=62.5mW, Resistance (Ohms)=43k, Supplier Device Package=0804, Supplier Part Number 1=Y7433CT-ND, Temperature Coefficient=±200ppm/°C, Tolerance=±5%, Applications="Automotive AEC-Q200", Circuit Type=Isolated, ComponentLink1Description=Datasheet, ComponentLink1URL=https://industrial.panasonic.com/cdbs/www-data/pdf/AOC0000/AOC0000C14.pdf, ComponentLink2Description="DigiKey Link", ComponentLink2URL=https://www.digikey.com/en/products/detail/panasonic-electronic-components/EXB-28V433JX/417403, Height - Seated (Max)="0.018\" (0.45mm)", LastUpdated="02/02/2024 21:35:40", Lifecycle Status=Active, Minimum Order=1, Mounting Type="Surface Mount", Number of Pins=8, Packaging=TapeAndReel, Part Number=EXB-28V433JX, Part Status=Active, PartId=428, Price=0.03, Series=EXB, Size / Dimension="0.079\" L x 0.039\" W (2.00mm x 1.00mm)", Supplier 1=DigiKey
R17 R18: library part ERA-6AED512V, "RES SMD 5.1K OHM 0.5% 1/8W 0805", Device Package="0805 (2012 Metric)", Manufacturer="Panasonic Electronic Components", Operating Temperature="-55°C ~ 155°C", Power (Watts)="0.125W, 1/8W", Ratings=AEC-Q200, Supplier Device Package=0805, Supplier Part Number 1=P123856CT-ND, Temperature Coefficient=±25ppm/°C, Tolerance=±0.5%, ComponentLink1Description=Datasheet, ComponentLink1URL=https://industrial.panasonic.com/cdbs/www-data/pdf/RDM0000/AOA0000C307.pdf, ComponentLink2Description="DigiKey Link", ComponentLink2URL=https://www.digikey.com/en/products/detail/panasonic-electronic-components/ERA-6AED512V/9373625, Composition="Thin Film", Features="Automotive AEC-Q200", Height - Seated (Max)="0.024\" (0.60mm)", LastUpdated="02/02/2024 21:00:47", Lifecycle Status=Active, Minimum Order=1, Number of Terminations=2, Package / Case="0805 (2012 Metric)", Packaging=TapeAndReel, Part Number=ERA-6AED512V, Part Status=Active, PartId=27812, Price=0.04, Resistance="5.1 kOhms", Series=ERA-6A, Size / Dimension="0.079\" L x 0.049\" W (2.00mm x 1.25mm)", Supplier 1=DigiKey
R21 R23: library part RNCS0805BKE10K0, "RES 10K OHM 0.1% 1/10W 0805", Device Package="0805 (2012 Metric)", Manufacturer="Stackpole Electronics Inc", Operating Temperature="-55°C ~ 155°C", Power (Watts)="0.1W, 1/10W", Ratings=AEC-Q200, Supplier Device Package=0805, Supplier Part Number 1=RNCS0805BKE10K0CT-ND, Temperature Coefficient=±25ppm/°C, Tolerance=±0.1%, ComponentLink1Description=Datasheet, ComponentLink1URL=https://www.seielect.com/catalog/sei-rncs_rnch.pdf, ComponentLink2Description="DigiKey Link", ComponentLink2URL=https://www.digikey.com/en/products/detail/stackpole-electronics-inc/RNCS0805BKE10K0/1800067, Composition="Thin Film", Features="Anti-Corrosive, Automotive AEC-Q200, Moisture Resistant", Height - Seated (Max)="0.026\" (0.65mm)", LastUpdated="02/02/2024 21:00:48", Lifecycle Status=Active, Minimum Order=1, Number of Terminations=2, Package / Case="0805 (2012 Metric)", Packaging=TapeAndReel, Part Number=RNCS0805BKE10K0, Part Status=Active, PartId=27713, Price=0.07, Resistance="10 kOhms", Series=RNCS, Size / Dimension="0.079\" L x 0.049\" W (2.00mm x 1.25mm)", Supplier 1=DigiKey
R27: library part 2-2176093-0, "RES SMD 15K OHM 0.1% 1/4W 0805", Device Package="0805 (2012 Metric)", Manufacturer="TE Connectivity Passive Product", Operating Temperature="-55°C ~ 155°C", Power (Watts)="0.25W, 1/4W", Supplier Device Package=0805, Supplier Part Number 1=A110656CT-ND, Temperature Coefficient=±25ppm/°C, Tolerance=±0.1%, ComponentLink1Description=Datasheet, ComponentLink1URL=https://www.te.com/commerce/DocumentDelivery/DDEController?Action=srchrtrv&DocNm=1773272&DocType=DS&DocLang=English, ComponentLink2Description="DigiKey Link", ComponentLink2URL=https://www.digikey.com/en/products/detail/te-connectivity-passive-product/2-2176093-0/4034124, Composition="Thin Film", Height - Seated (Max)="0.026\" (0.65mm)", LastUpdated="03/02/2024 20:58:42", Lifecycle Status=Active, Minimum Order=1, Number of Terminations=2, Package / Case="0805 (2012 Metric)", Packaging=TapeAndReel, Part Number=2-2176093-0, Part Status=Active, PartId=44076, Price=0.14, Resistance="15 kOhms", Series="RP73P, Holsworthy", Size / Dimension="0.079\" L x 0.049\" W (2.00mm x 1.25mm)", Supplier 1=DigiKey
Y1: library part ABM10-166-12.000MHZ-T3, "CRYSTAL 12.00MHZ 8PF LOW ESR SMD", Device Package="4-SMD, No Lead", ESR (Equivalent Series Resistance)="125 Ohms", Frequency Stability=±10ppm, Load Capacitance=8pF, Manufacturer="Abracon LLC", Operating Mode=Fundamental, Operating Temperature="-20°C ~ 70°C", Supplier Part Number 1=535-13520-1-ND, ComponentLink1Description=Datasheet, ComponentLink1URL=https://abracon.com/Resonators/ABM10-166-12.000MHz.pdf, ComponentLink2Description="DigiKey Link", ComponentLink2URL=http://digikey.com/product-detail/en/abracon-llc/ABM10-166-12.000MHZ-T3/535-13520-1-ND/6140273, Frequency=12MHz, Frequency Tolerance=±10ppm, Height - Seated (Max)="0.028\" (0.70mm)", LastUpdated="19/03/2020 22:27:46", Lifecycle Status=Active, Minimum Order=1, Mounting Type="Surface Mount", Package / Case="4-SMD, No Lead", Packaging=TapeAndReel, Part Number=ABM10-166-12.000MHZ-T3, Part Status=Active, PartId=285, Price=0.28, Series=ABM10, Size / Dimension="0.098\" L x 0.079\" W (2.50mm x 2.00mm)", Supplier 1=DigiKey, Type="MHz Crystal"
Y2: library part ASEMB-50.000MHZ-LC-T, "MEMS OSC XO 50.0000MHZ CMOS SMD", Current - Supply (Max)=16mA, Frequency Stability=±50ppm, Manufacturer="Abracon LLC", Operating Temperature="-40°C ~ 85°C", Package / Case="4-SMD, No Lead", Supplier Part Number 1=535-11758-1-ND, Voltage - Supply="1.8V ~ 3.3V", Base Resonator=MEMS, ComponentLink1Description=Datasheet, ComponentLink1URL=https://abracon.com/Oscillators/ASEMB.pdf, ComponentLink2Description="DigiKey Link", ComponentLink2URL=http://digikey.com/product-detail/en/abracon-llc/ASEMB-50.000MHZ-LC-T/535-11758-1-ND/2810027, Frequency=50MHz, Function=Enable/Disable, Height - Seated (Max)="0.035\" (0.90mm)", LastUpdated="02/02/2024 21:32:16", Lifecycle Status=Active, Minimum Order=1, Mounting Type="Surface Mount", Output=CMOS, Packaging=TapeAndReel, Part Number=ASEMB-50.000MHZ-LC-T, Part Status=Active, PartId=198, Price=1.25, Series="ASEMB, Pure Silicon™", Size / Dimension="0.126\" L x 0.098\" W (3.20mm x 2.50mm)", Supplier 1=DigiKey, Type="XO (Standard)"

## Via types
v1: diameter 19.68, hole 11.81, Top Layer to Bottom Layer, 48 vias

## Nets (pads, with @x,y where several pads share a name; then routed paths per layer and width w, separated by ;. In a path a pad name is that pad's centre, name@x,y a point inside that pad or via, vN(x,y) a via of type N, cw(c..) or ccw(c..) an arc to the next point about the centre after c; other vN are vias at no path point)
0-CLK: B2.85 J4.08
0-CRS_DV: B2.89 J4.34
0-EXOUT: B2.90 J4.42
0-LINKSTA: B2.91 J4.30
0-MDC: B2.78 J4.24
0-MDIO: B2.79 J4.26
0-RX_ER: B2.88 J4.40
0-RXD_N: B2.86 J4.20
0-RXD_P: B2.87 J4.18
0-TXD_EN: B2.80 J4.38
0-TXD_N: B2.82 J4.14
0-TXD_P: B2.81 J4.12
0-WAKEONLAN: B2.92 J4.32
1-CLK: B2.9 R19.6
1-CRS_DV: B2.13 R16.7
1-EXOUT: B2.5 R16.8
1-INT: B2.169 J4.44 R24.5
1-LINKSTA: B2.4
1-MDC: B2.2 R19.8
1-MDIO: B2.3 R19.7
1-RX_ER: B2.12 R16.6
1-RXD_N: B2.10 R15.5
1-RXD_P: B2.11 R15.6
1-TXD_EN: B2.6 R16.5
1-TXD_N: B2.8 R15.7
1-TXD_P: B2.7 R15.8
1-WAKEONLAN: B2.1
1_0-CRS_DV: B3.18 R14.1 R16.2
1_0-EXOUT: C23.1 D2.1 R13.4 R16.1
1_0-INT: B3.11 R24.4 R25.1
1_0-MDC: B3.13 R19.1
1_0-MDIO: B3.12 R13.3 R19.2
1_0-RX_ER: B3.21 R16.3 R26.8
1_0-RXD_N: B3.17 R12.8 R15.4
1_0-RXD_P: B3.16 R15.3 R26.6
1_0-TXD_EN: B3.23 R16.4
1_0-TXD_N: B3.24 R15.2
1_0-TXD_P: B3.26 R15.1
1_1-CLK: B3.30 C21.1 C22.1 R19.5
+3V3: B1.3 B1.9 B1.16 B1.30 B1.41 B1.45 B2.18 B2.25 B2.32 B2.48 B2.60 B2.84 B2.111 B2.112 B3.4 B3.7 B3.19 B3.25 C1.2 C2.2 C3.2 C4.2 C5.2 C6.2 C9.2 C10.2 C11.2 C12.2 C13.2 C14.2 C16.2 C18.2 C19.2 C20.2 C24.2 C25.2 J3.01 R2.2 R8.1 R9.1 R10.1 R12.1 R12.2 R12.3 R12.4 R13.5 R13.6 R13.8 R14.2 R20.2 R25.2 Y2.1 Y2.4
+5: J1.1 J2.A4 J2.A9 J2.B4 J2.B9 R6.2 R27.2
+5V: C15.2 C17.2 C26.2
_RXD2: B3.15 R26.7
_RXD3: B3.14 R13.2
CAGE: J1.S J2.S J5.S
JTAG_EXT_RST: J3.10 R7.2
JTAG_EXT_TCK: B2.62 J3.04 R4.2
JTAG_EXT_TDI: B2.65 J3.08 R5.2
JTAG_EXT_TMS: B2.63 J3.02 R1.2
JTAG_TDO: B1.36 B2.64 J3.06 R2.1
LED0_GREEN: J5.12 R21.2
LED1_YELLOW: J5.9 R22.1 R23.2
NetB1_4: B1.4 R3.1
NetB1_7: B1.7 C7.2 Y1.1
NetB1_8: B1.8 C8.2 Y1.3
NetB1_12: B1.12 R27.1 R28.2
NetB1_19: B1.19 R8.2
NetB1_20: B1.20 R9.2
NetB1_21: B1.21 R10.2
NetB1_22: B1.22 R11.2
NetB1_23: B1.23 B2.37
NetB1_28: B1.28 D1.K
NetB1_29: B1.29 R7.1
NetB1_33: B1.33 R5.1
NetB1_34: B1.34 R4.1
NetB1_35: B1.35 R1.1
NetB2_36: B2.36 R11.1
NetB2_93: B2.93
NetB2_96: B2.96
NetB2_127: B2.127
NetB2_128: B2.128
NetB2_168: B2.168
NetB3_31: B3.31
NetB3_32: B3.32
NetD1_A: D1.A R6.1
NetIC1_6: J4.03
NetIC1_7: J4.01
NetIC2_6: J4.07
NetIC2_7: J4.05
NetIC3_1: IC4.1
NetIC3_4: IC4.2
NetIC3_6: J4.11
NetIC3_7: J4.09
NetJ2_A5: J2.A5 R17.1
NetJ2_B5: J2.B5 R18.1
NetJ5_10: J5.10 R23.1
NetJ5_11: J5.11 R20.1 R21.1
NetJ10_P0: R28.1
NetR19_3: R19.3 R19.4 Y2.3
RXCLK: B3.20 R12.5